# Altium PCB ESP32 WITH FLASHER.PcbDoc
Units mil, origin at the board's own origin, x right, y up, seen from the top; angles counter-clockwise.
Board outline 3605 x 2250 mil, 2 copper layers (Top Layer, Bottom Layer); 22 components, 22 nets, 110 pads, 4 vias.
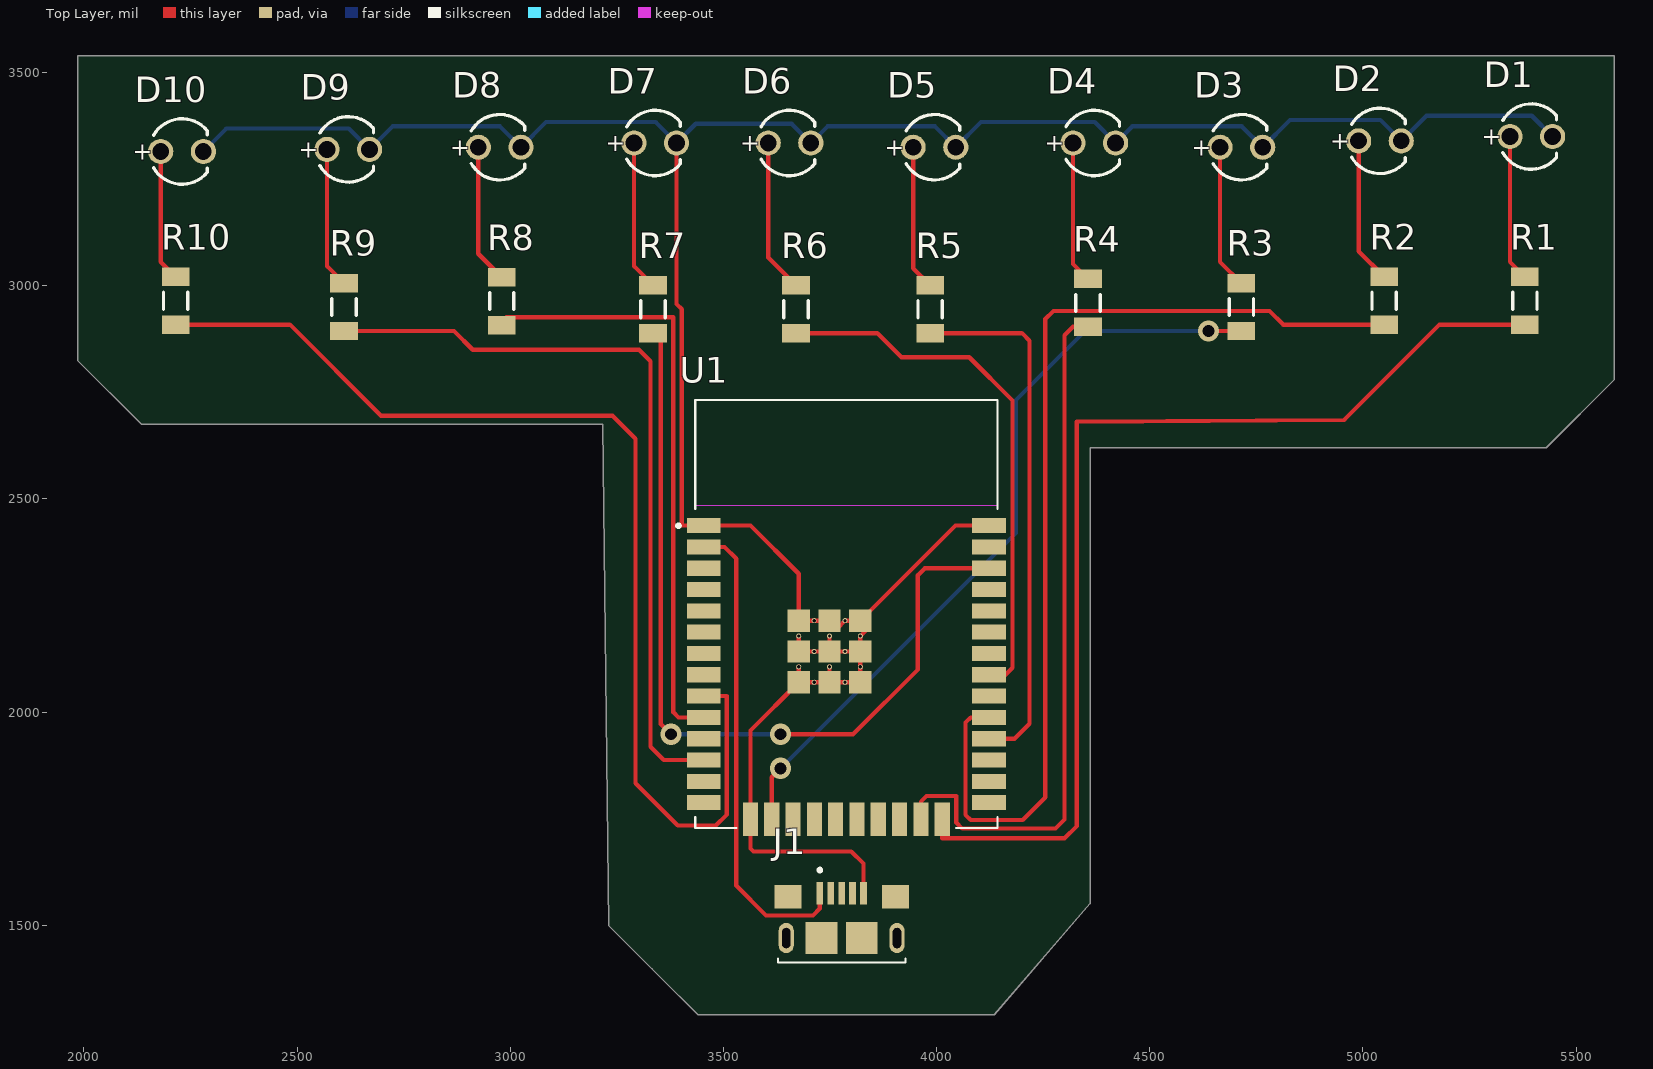
[diagram p0: Top Layer view]
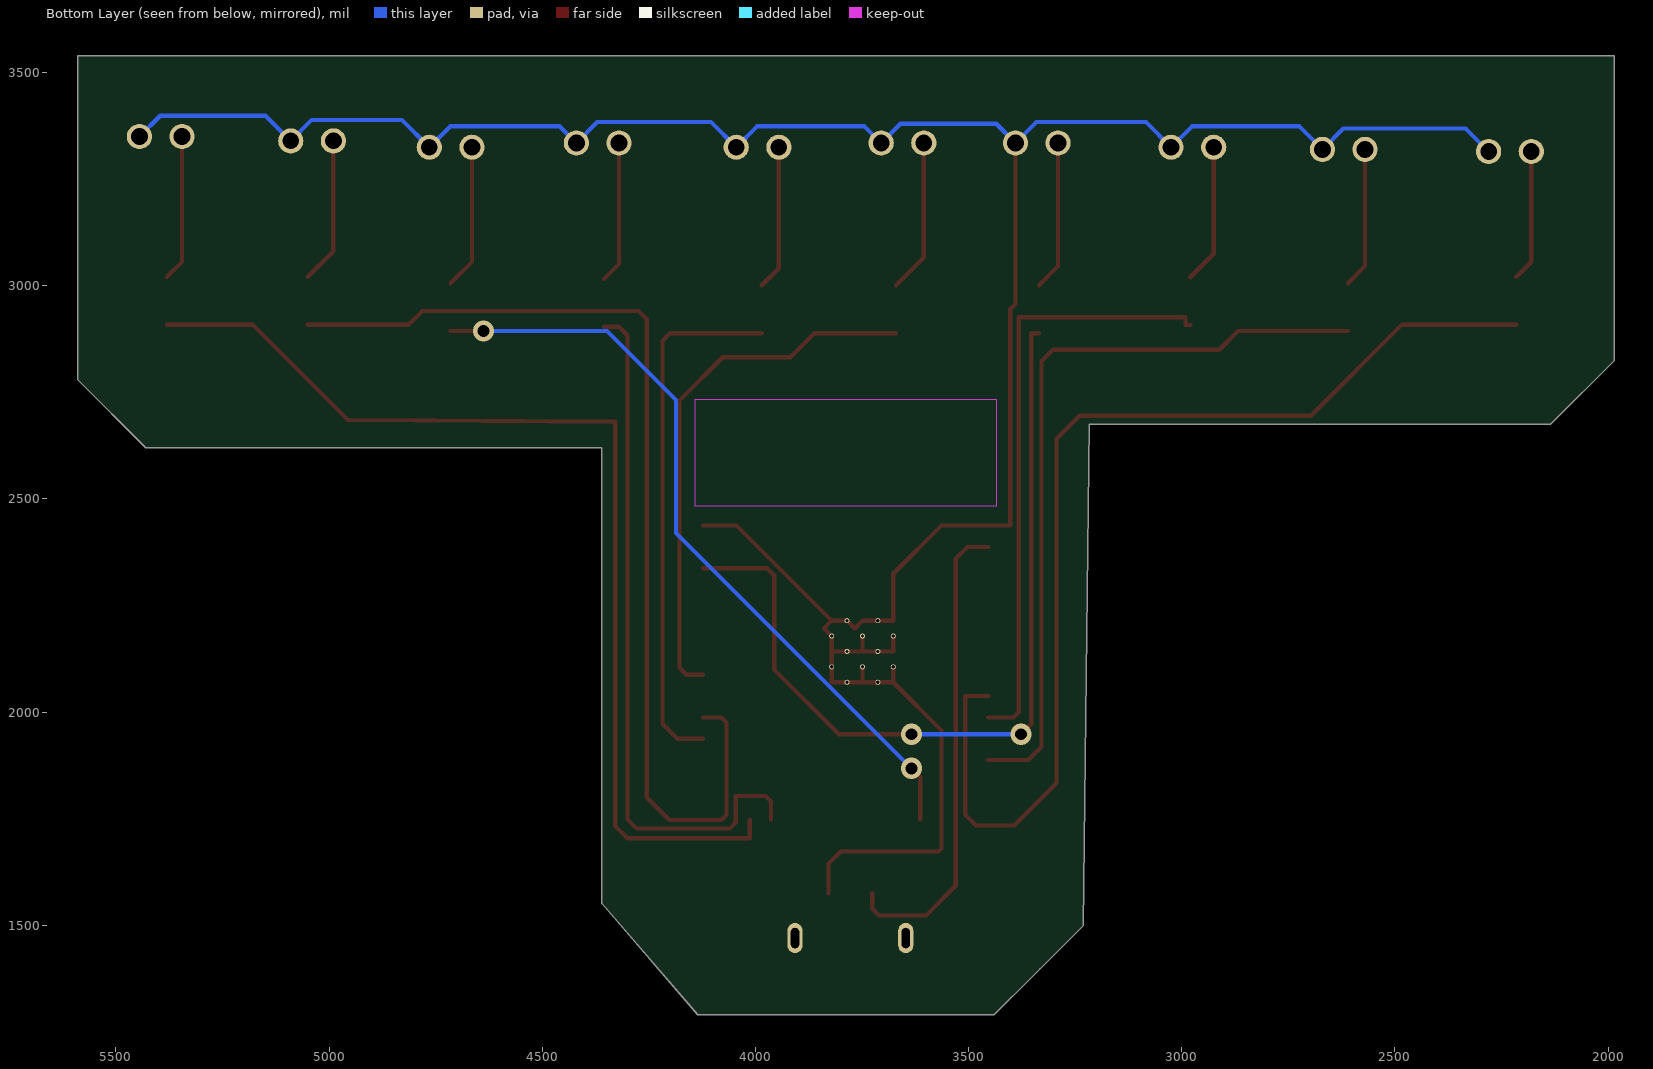
[diagram p1: Bottom Layer view, seen from below]

## Layer stack, top to bottom
Top Solder: solder mask 0.4, Solder Resist, Dk 3.5
Top Layer: signal copper 1.4
Dielectric 1: dielectric 12.6, FR-4, Dk 4.8
Bottom Layer: signal copper 1.4
Bottom Solder: solder mask 0.4, Solder Resist, Dk 3.5

## Board outline
1985,3540 5590,3540 5590,2780 5430,2620 4360,2620 4360,1551 4135,1290 3440,1290 3350,1380 3332.5,1397.5 3230.71,1499.29 3217.3,2675 2135,2675 1985,2825 1985,3535

## Design rules (kind name [scope] priority, off if disabled: settings)
Clearance Clearance_1 [All] p1: gap=10 ignorepadtopadclearanceinfootprint=FALSE
Clearance [All] p2: gap=10 ignorepadtopadclearanceinfootprint=FALSE
PolygonConnect [All] p1: connectstyle=Relief reliefconductorwidth=10 reliefentries=4 polygonreliefangle="90 Angle" airgapwidth=10
RoutingVias [All] p1: holewidth=28 width=50 viastyle="Through Hole" minholewidth=28 minwidth=50 maxholewidth=28 maxwidth=50
SolderMaskExpansion [All] p1: expansion=4 istentingtop=FALSE
Width [All] p1: maxlimit=10 minlimit=10 preferedwidth=10
30 further rules are at their usual default settings.

## Components (designator, comment, footprint, x,y, rotation, side; value= is the part's Value field where it differs from the comment)
D1 "15400385A3590" WL-TIRW_D3.9H5.3 55395,53350 r0 top
D2 "15400385A3590" WL-TIRW_D3.9H5.3 55040,53340 r0 top
D3 "15400385A3590" WL-TIRW_D3.9H5.3 54715,53325 r0 top
D4 "15400385A3590" WL-TIRW_D3.9H5.3 54370,53335 r0 top
D5 "15400385A3590" WL-TIRW_D3.9H5.3 53995,53325 r0 top
D6 "15400385A3590" WL-TIRW_D3.9H5.3 53655,53335 r0 top
D7 "15400385A3590" WL-TIRW_D3.9H5.3 53340,53335 r0 top
D8 "15400385A3590" WL-TIRW_D3.9H5.3 52975,53325 r0 top
D9 "15400385A3590" WL-TIRW_D3.9H5.3 52620,53320 r0 top
D10 "15400385A3590" WL-TIRW_D3.9H5.3 52230,53315 r0 top
J1 "10118193-0001LF" AMPHENOL_10118193-0001LF 3777.24,1470 r0 top
R1 "ERJ-8GEY0R00V" RESC3216X70X50NL05T20 5380,2965 r90 top
R2 "ERJ-8GEY0R00V" RESC3216X70X50NL05T20 5050,2965 r90 top
R3 "ERJ-8GEY0R00V" RESC3216X70X50NL05T20 4715,2950 r90 top
R4 "ERJ-8GEY0R00V" RESC3216X70X50NL05T20 4355,2960 r90 top
R5 "ERJ-8GEY0R00V" RESC3216X70X50NL05T20 3985,2945 r90 top
R6 "ERJ-8GEY0R00V" RESC3216X70X50NL05T20 3670,2945 r90 top
R7 "ERJ-8GEY0R00V" RESC3216X70X50NL05T20 3335,2945 r90 top
R8 "ERJ-8GEY0R00V" RESC3216X70X50NL05T20 2980,2963.9 r90 top
R9 "ERJ-8GEY0R00V" RESC3216X70X50NL05T20 2610,2950 r90 top
R10 "ERJ-8GEY0R00V" RESC3216X70X50NL05T20 2215,2965 r90 top
U1 "ESP32-WROOM-32" MODULE_ESP32-WROOM-32 3788.25,2230.43 r0 top

## Footprints (in the part's own frame and the unit in brackets; to place one, negate y for a bottom-side part, rotate by r counter-clockwise, add the part's x,y. Pads: shape width x height; smd on the part's side, far side on the other; paste and mask are expansions set on the pad)
AMPHENOL_10118193-0001LF [mm]
  rect 0.4x1.35 smd: 1(-1.3,2.675) 2(-0.65,2.675) 3(0,2.675) 4(0.65,2.675) 5(1.3,2.675)
  rect 1.6x1.4 smd: S1(-3.2,2.45) S2(3.2,2.45)
  rect 1.9x1.9 smd: S3(1.2,0) S4(-1.2,0)
  oval 0.9x1.8 hole 0.5 slot 1.2 at 90 deg: S5(-3.3,0) S6(3.3,0)
  silkscreen extent -3.8,-1.45 3.8,4.15, body extent -3.94,-2.73 3.92,2.98, height 2.86
MODULE_ESP32-WROOM-32 [mm]
  rect 2x0.9 smd: 1(-8.5,5.26) 2(-8.5,3.99) 3(-8.5,2.72) 4(-8.5,1.45) 5(-8.5,0.18) 6(-8.5,-1.09) 7(-8.5,-2.36) 8(-8.5,-3.63) 9(-8.5,-4.9) 10(-8.5,-6.17) 11(-8.5,-7.44) 12(-8.5,-8.71) 13(-8.5,-9.98) 14(-8.5,-11.25) 25(8.5,-11.25) 26(8.5,-9.98) 27(8.5,-8.71) 28(8.5,-7.44) 29(8.5,-6.17) 30(8.5,-4.9) 31(8.5,-3.63) 32(8.5,-2.36) 33(8.5,-1.09) 34(8.5,0.18) 35(8.5,1.45) 36(8.5,2.72) 37(8.5,3.99) 38(8.5,5.26)
  rect 0.9x2 smd: 15(-5.715,-12.25) 16(-4.445,-12.25) 17(-3.175,-12.25) 18(-1.905,-12.25) 19(-0.635,-12.25) 20(0.635,-12.25) 21(1.905,-12.25) 22(3.175,-12.25) 23(4.445,-12.25) 24(5.715,-12.25)
  rect 1.33x1.33 smd: 39_1(-2.835,-0.405) 39_2(-1,-0.405) 39_3(0.835,-0.405) 39_4(-2.835,-2.24) 39_5(-1,-2.24) 39_6(0.835,-2.24) 39_7(-2.835,-4.075) 39_8(-1,-4.075) 39_9(0.835,-4.075)
  round 0.3 hole 0.2: 39_10(-1.917,-0.405) 39_11(-0.082,-0.405) 39_12(-2.835,-1.323) 39_13(-1,-1.323) 39_14(0.835,-1.323) 39_15(-1.917,-2.24) 39_16(-0.082,-2.24) 39_17(-2.835,-3.158) 39_18(-1,-3.158) 39_19(0.835,-3.158) 39_20(-1.917,-4.075) 39_21(-0.082,-4.075)
  Keep-Out Layer region: 9,6.45 -9,6.45 -9,12.75 9,12.75
  Keep-Out Layer region: 9,6.45 -9,6.45 -9,12.75 9,12.75
  silkscreen extent -10.1,-12.75 9,12.75, body extent -9,-12.75 9,12.75, height 3.2
RESC3216X70X50NL05T20 [mm] "Chip Resistor, 2-Leads, Body 3.20x1.60mm, IPC Medium Density"
  rect 1.1x1.65 smd: 1(-1.425,0) 2(1.425,0)
  silkscreen extent -0.5,-0.73 0.5,0.73, body extent -1.63,-0.82 1.62,0.82, height 0.7
WL-TIRW_D3.9H5.3 [mm] "THT Infrared Round Waterclear, body diameter 3.9mm"
  round 1.5 hole 1: 1(-1268.73,-1270) 2(-1271.27,-1270)
  silkscreen extent -1271.69,-1271.95 -1268.5,-1268.05, body extent -1271.95,-1271.95 -1268.38,-1268.05, height 5.33

## Part data
D1 D2 D3 D4 D5 D6 D7 D8 D9 D10: library part CMP-03913-82270983-1, "15400385A3590 WL-TIRW THT Infrared Round Waterclear", Forward Current=1A, Forward Voltage=1.5V, Max Reverse Voltage (DC)=5V, NexarPartId=82270983, Packaging=Bulk, Peak Wavelength=850nm, RoHS=Non-Compliant, Viewing Angle=35°, Wavelength=850nm
J1: "Micro USB 2.0, Input Output Connectors, B TYPE RECEPTACLE", Package=None, Availability="In Stock", Check_prices=https://www.snapeda.com/parts/10118193-0001LF/Amphenol+FCI/view-part/?ref=eda, MF="Amphenol ICC", MP=10118193-0001LF, Price=None, Purchase-URL=https://pricing.snapeda.com/search/part/10118193-0001LF/?ref=eda, SnapEDA_Link=https://www.snapeda.com/parts/10118193-0001LF/Amphenol+FCI/view-part/?ref=snap
R1 R2 R3 R4 R5 R6 R7 R8 R9 R10: library part CMP-2003-00541-1, Manufacturer=Panasonic, Part Number=ERJ-8GEY0R00V
U1: "Bluetooth, WiFi 802.11b/g/n, Bluetooth v4.2 +EDR, Class 1, 2 and 3 Transceiver Module 2.4GHz ~ 2.5GHz Antenna Not Included, U.FL Surface Mount", Package="Module Espressif Systems", Availability="In Stock", Check_prices=https://www.snapeda.com/parts/ESP32-WROOM-32/Espressif+Systems/view-part/?ref=eda, MF="Espressif Systems", MP=ESP32-WROOM-32, Price=None, Purchase-URL=https://pricing.snapeda.com/search/part/ESP32-WROOM-32/?ref=eda, SnapEDA_Link=https://www.snapeda.com/parts/ESP32-WROOM-32/Espressif+Systems/view-part/?ref=snap

## Via types
v1: diameter 50, hole 28, Top Layer to Bottom Layer, 4 vias

## Nets (pads, with @x,y where several pads share a name; then routed paths per layer and width w, separated by ;. In a path a pad name is that pad's centre, name@x,y a point inside that pad or via, vN(x,y) a via of type N, cw(c..) or ccw(c..) an arc to the next point about the centre after c; other vN are vias at no path point)
GND: D1.1 D2.1 D3.1 D4.1 D5.1 D6.1 D7.1 D8.1 D9.1 D10.1 J1.5 U1.1 U1.15 U1.38 U1.39_1 U1.39_2 U1.39_3 U1.39_4 U1.39_5 U1.39_6 U1.39_7 U1.39_8 U1.39_9 U1.39_10 U1.39_11 U1.39_12 U1.39_13 U1.39_14 U1.39_15 U1.39_16 U1.39_17 U1.39_18 U1.39_19 U1.39_20 U1.39_21 | length 6807.5
  Top Layer w10: D7.1 3390,2957.48 3402.48,2945 3402.48,2437.52 U1.1 3563.48,2437.52 3676.63,2324.37 U1.39_1 U1.39_10 U1.39_2 3766.94,2196.43 U1.39_11 U1.39_3 ; U1.39_17 U1.39_7 ; U1.39_12 U1.39_4 U1.39_15 U1.39_5 ; U1.39_18 U1.39_8 ; U1.39_13 U1.39_5 ; J1.5 3828.43,1644.57 3800,1673 3570.5,1673 3563.25,1680.25 U1.15 3563.25,1956.61 U1.39_7 ; U1.38 4044.15,2437.52 U1.39_3 ; U1.39_7 U1.39_20 U1.39_8 ; U1.39_8 U1.39_21 U1.39_9 U1.39_19 U1.39_6 ; U1.39_5 U1.39_16 U1.39_6 ; U1.39_6 U1.39_14 3839.18,2196.43 U1.39_3
  Bottom Layer w10: D10.1 2334,3369 2621,3369 D9.1 2724,3374 2976,3374 D8.1 3084,3384 3341,3384 D7.1 3435,3380 3660,3380 D6.1 3744,3374 3996,3374 D5.1 4104,3384 4371,3384 D4.1 4459,3374 4716,3374 D3.1 4829,3389 5041,3389 D2.1 5149,3399 5396,3399 D1.1
NetD1_2: D1.2 R1.2 | length 343.4
  Top Layer w10: D1.2 5345,3056.1 R1.2
NetD2_2: D2.2 R2.2 | length 343.8
  Top Layer w10: D2.2 4990,3081.1 R2.2
NetD3_2: D3.2 R3.2 | length 339.6
  Top Layer w10: D3.2 4665,3056.1 R3.2
NetD4_2: D4.2 R4.2 | length 333.4
  Top Layer w10: D4.2 4320,3051.1 R4.2
NetD5_2: D5.2 R5.2 | length 340.5
  Top Layer w10: D5.2 3945,3041.1 R5.2
NetD6_2: D6.2 R6.2 | length 360.8
  Top Layer w10: D6.2 3605,3066.1 R6.2
NetD7_2: D7.2 R7.2 | length 352.5
  Top Layer w10: D7.2 3290,3046.1 R7.2
NetD8_2: D8.2 R8.2 | length 327.8
  Top Layer w10: D8.2 2925,3075 R8.2
NetD9_2: D9.2 R9.2 | length 330.5
  Top Layer w10: D9.2 2570,3046.1 R9.2
NetD10_2: D10.2 R10.2 | length 308.4
  Top Layer w10: D10.2 2180,3056.1 R10.2
NetR1_1: R1.1 U1.24 | length 2463.7
  Top Layer w10: U1.24 4013.25,1704 4300,1704 4329,1733 4329,2681 4956,2685 5179.9,2908.9 R1.1
NetR2_1: R2.1 U1.29 | length 2428.5
  Top Layer w10: U1.29 4080,1987.52 4068,1975.52 4068,1759 4080,1747 4202,1747 4255,1800 4255,2922 4274,2941 4781,2941 4813.1,2908.9 R2.1
NetR3_1: R3.1 U1.16 | length 1817.2
  Top Layer w10: U1.16 3613.25,1847.25 v1(3634,1868) ; v1(4637.9,2893.9) R3.1
  Bottom Layer w10: v1(3634,1868) 4186,2420 4186,2732 4347.9,2893.9 v1(4637.9,2893.9)
NetR4_1: R4.1 U1.23 | length 1659.7
  Top Layer w10: U1.23 3963.25,1790 3976.25,1803 4046,1803 4046,1741 4060,1727 4279,1727 4300,1748 4300,2883.9 4320,2903.9 R4.1
NetR5_1: R5.1 U1.28 | length 1248.4
  Top Layer w10: R5.1 4200,2888.9 4218,2870.9 4218,1972.52 4183,1937.52 U1.28
NetR6_1: R6.1 U1.31 | length 1262.3
  Top Layer w10: R6.1 3860.86,2888.9 3917.52,2832.24 4076.76,2832.24 4178,2731 4178,2104 4161.52,2087.52 U1.31
NetR7_1: R7.1 U1.36 | length 2005.5
  Top Layer w10: R7.1 3353,2888.9 3353,1972 v1(3377,1948) ; v1(3634,1948) 3804,1948 3956,2100 3956,2321 3972.52,2337.52 U1.36
  Bottom Layer w10: v1(3377,1948) v1(3634,1948)
NetR8_1: R8.1 U1.10 | length 1423.3
  Top Layer w10: R8.1 2991,2907.8 2991,2926 3382.48,2926 3382.48,1999.52 3394.48,1987.52 U1.10
NetR9_1: R9.1 U1.12 | length 1790.3
  Top Layer w10: R9.1 2868.1,2893.9 2912,2850 3302,2850 3329,2823 3329,1918.52 3360,1887.52 U1.12
NetR10_1: R10.1 U1.9 | length 2595.7
  Top Layer w10: R10.1 2483,2908.9 2696.9,2695 3240,2695 3294,2641 3294,1833 3393,1734 3482,1734 3508,1760 3508,2037.52 U1.9
VCC: J1.1 U1.2 | length 1122.8
  Top Layer w10: U1.2 3502.48,2387.52 3530,2360 3530,1593 3600,1523 3710,1523 3726.06,1539.06 J1.1
pads on no net: J1.2 J1.3 J1.4 J1.S1 J1.S2 J1.S3 J1.S4 J1.S5 J1.S6 U1.3 U1.4 U1.5 U1.6 U1.7 U1.8 U1.11 U1.13 U1.14 U1.17 U1.18 U1.19 U1.20 U1.21 U1.22 U1.25 U1.26 U1.27 U1.30 U1.32 U1.33 U1.34 U1.35 U1.37

## Text inside footprints (layer, text, board x,y; h text height)
D1: Top Overlay "+" at 5278.86,3330.32 h40
D2: Top Overlay "+" at 4923.86,3320.32 h40
D3: Top Overlay "+" at 4598.86,3305.32 h40
D4: Top Overlay "+" at 4253.86,3315.32 h40
D5: Top Overlay "+" at 3878.86,3305.32 h40
D6: Top Overlay "+" at 3538.86,3315.32 h40
D7: Top Overlay "+" at 3223.86,3315.32 h40
D8: Top Overlay "+" at 2858.86,3305.32 h40
D9: Top Overlay "+" at 2503.86,3300.32 h40
D10: Top Overlay "+" at 2113.86,3295.32 h40
J1: Top 3D Body "PCB END" at 3968.19,1422.76 h16
U1: Top 3D Body "ANTENNA" at 3552.03,2584.76 h70